# Altium PCB Thesis_PCB.PcbDoc
Units mil, origin at the board's own origin, x right, y up, seen from the top; angles counter-clockwise.
Board outline 1771.38 x 2177.28 mil, 2 copper layers (Top Layer, Bottom Layer); 6 components, 10 nets, 51 pads, 0 vias.
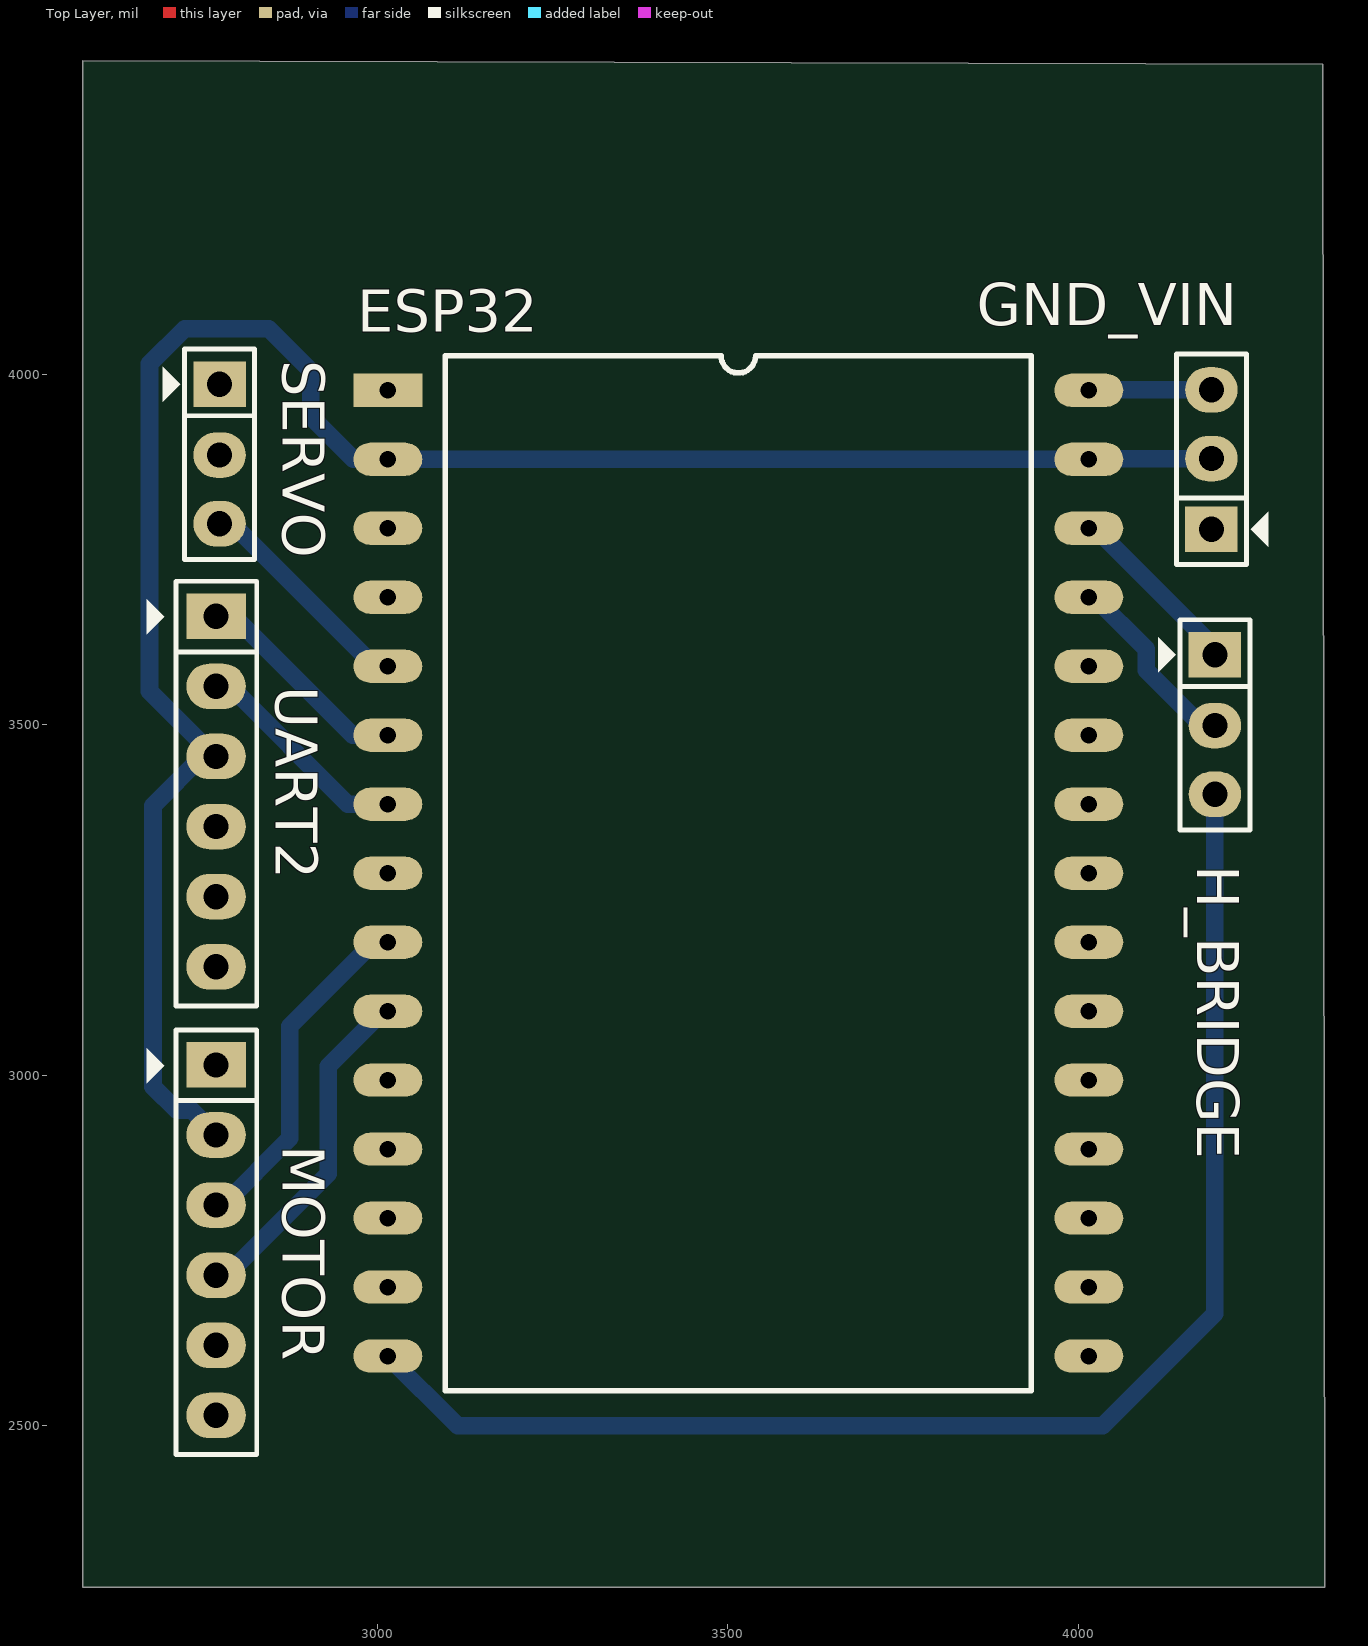
[diagram p0: Top Layer view]
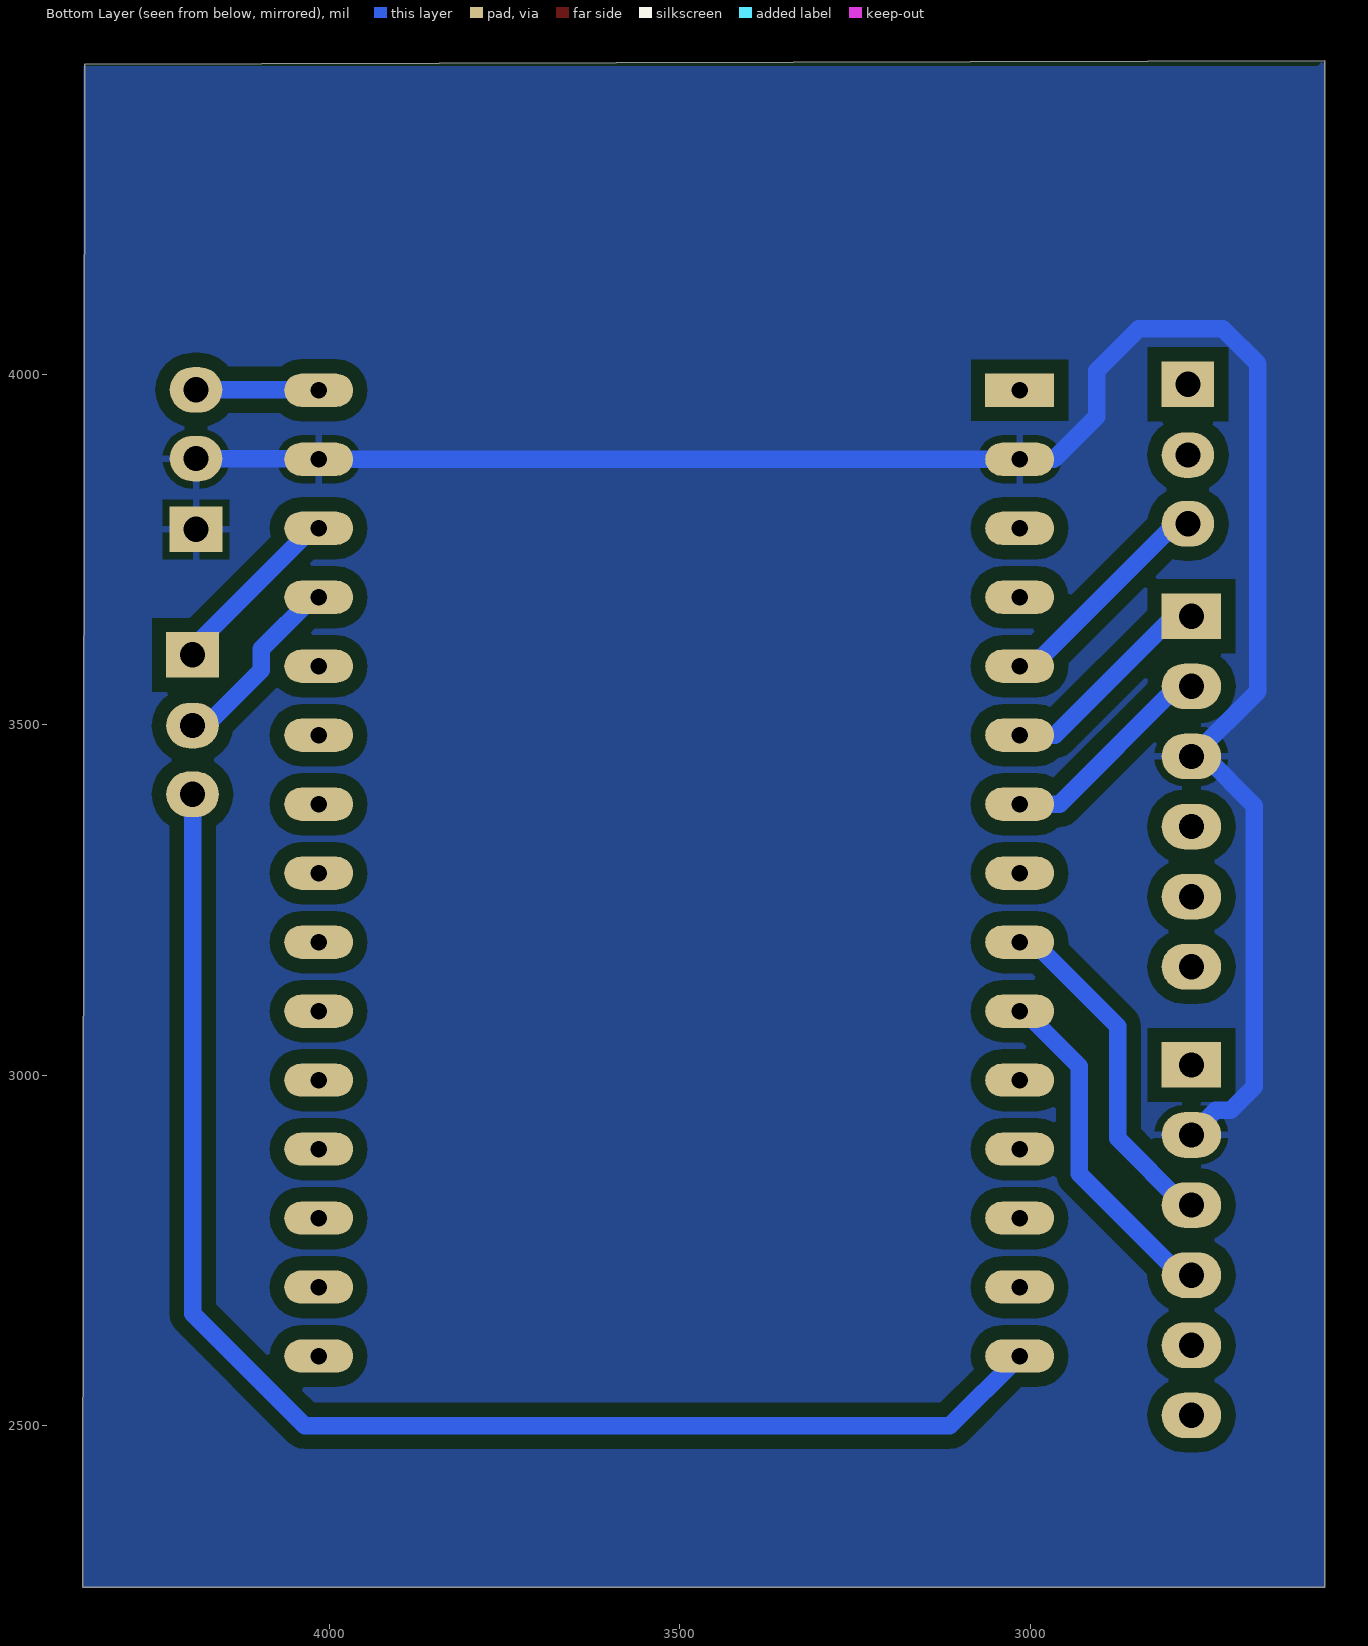
[diagram p1: Bottom Layer view, seen from below]
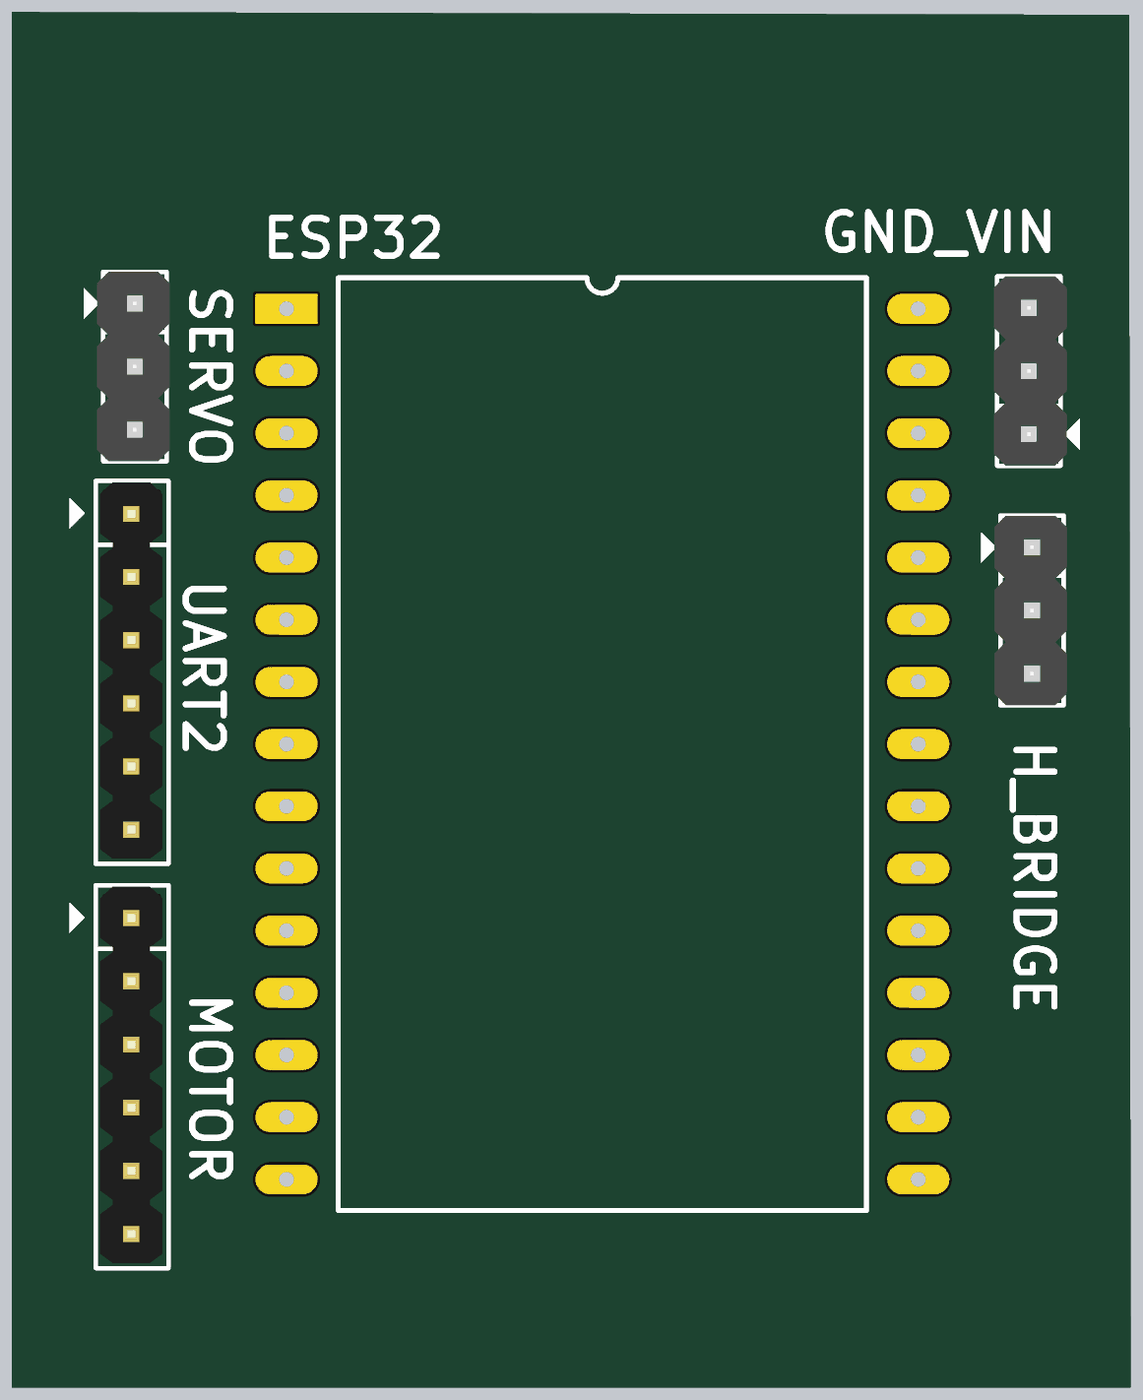
[diagram p2: 3D render of the assembled board from above, using the file's embedded part models]

## Layer stack, top to bottom
Top Solder: solder mask 0.4, Solder Resist, Dk 3.5
Top Layer: signal copper 1.4
Dielectric 1: dielectric 12.6, FR-4, Dk 4.8
Bottom Layer: signal copper 1.4
Bottom Solder: solder mask 0.4, Solder Resist, Dk 3.5

## Board outline
2580,2270 4351.38,2270 4348.65,4442.85 2580,4447.28

## Design rules (kind name [scope] priority, off if disabled: settings)
Clearance [All] p1: gap=20 ignorepadtopadclearanceinfootprint=FALSE except(0: Arc-Hole Track-Hole SMDPad-Hole THPad-Hole Via-Hole Fill-Hole Poly-Hole Region-Hole Text-Hole; 10: Fill-Fill Fill-Poly Fill-Region Poly-Poly Poly-Region Region-Region)
PolygonConnect [All] p1: connectstyle=Relief reliefconductorwidth=10 reliefentries=4 polygonreliefangle="90 Angle" airgapwidth=10
RoutingVias [All] p1: holewidth=28 width=50 viastyle="Through Hole" minholewidth=28 minwidth=50 maxholewidth=28 maxwidth=50
SolderMaskExpansion [All] p1: expansion=4
Width [All] p1: maxlimit=25 minlimit=25 preferedwidth=25
30 further rules are at their usual default settings.

## Components (designator, comment, footprint, x,y, rotation, side; value= is the part's Value field where it differs from the comment)
ESP32 "Component_1" ESP32 3015,3977.4 r0 top
GND_VIN "Header 3" JP3 4190,3879 r90 top
H_BRIDGE "Header 3" JP3 4195,3500 r270 top
MOTOR "Header 6" JP6 2770,3015 r270 top
SERVO "Header 3" JP3 2775,3886 r270 top
UART2 "Header 6" JP6 2770,3655 r270 top

## Footprints (in the part's own frame and the unit in brackets; to place one, negate y for a bottom-side part, rotate by r counter-clockwise, add the part's x,y. Pads: shape width x height; smd on the part's side, far side on the other; paste and mask are expansions set on the pad)
ESP32 [mm]
  rect 2.5x1.2 hole 0.6: 1(0,0)
  oval 2.5x1.2 hole 0.6: 2(0,-2.5) 3(0,-5) 4(0,-7.5) 5(0,-10) 6(0,-12.5) 7(0,-15) 8(0,-17.5) 9(0,-20) 10(0,-22.5) 11(0,-25) 12(0,-27.5) 13(0,-30) 14(0,-32.5) 15(0,-35) 16(25.4,-35) 17(25.4,-32.5) 18(25.4,-30) 19(25.4,-27.5) 20(25.4,-25) 21(25.4,-22.5) 22(25.4,-20) 23(25.4,-17.5) 24(25.4,-15) 25(25.4,-12.5) 26(25.4,-10) 27(25.4,-7.5) 28(25.4,-5) 29(25.4,-2.5) 30(25.4,0)
  silkscreen extent 2.08,-36.25 23.32,1.25
JP3 [mil] "Jumper 3"
  rect 65x75 hole 36: 1(-100,0)
  oval 65x75 hole 36: 2(1,0) 3(99,0)
  silkscreen extent -150,-81 150,50, body extent -150,-60 150,55, height 355
JP6 [mil] "JP6"
  rect 65x85 hole 36: 1(0,0)
  oval 65x85 hole 36: 2(100,0) 3(200,0) 4(300,0) 5(400,0) 6(500,0)
  silkscreen extent -50,-99 556,58, body extent -48,-50 548,48, height 323

## Part data
GND_VIN H_BRIDGE SERVO: "Header, 3-Pin", LatestRevisionDate=17-Jul-2002, LatestRevisionNote="Re-released for DXP Platform.", Publisher="Altium Limited"
MOTOR UART2: "Header, 6-Pin", LatestRevisionDate=17-Jul-2002, LatestRevisionNote="Re-released for DXP Platform.", Publisher="Altium Limited"

## Nets (pads, with @x,y where several pads share a name; then routed paths per layer and width w, separated by ;. In a path a pad name is that pad's centre, name@x,y a point inside that pad or via, vN(x,y) a via of type N, cw(c..) or ccw(c..) an arc to the next point about the centre after c; other vN are vias at no path point)
GND: ESP32.2 ESP32.29 GND_VIN.1 GND_VIN.2 MOTOR.2 UART2.3 | length 2888.4
  Bottom Layer w25: MOTOR.2 2735,2950 2714.04,2950 2680,2984.04 2680,3385 2750,3455 UART2.3@2768.08,3455 ; UART2.3 UART2.3@2768.08,3455 ; GND_VIN.2 4016.02,3880 ESP32.29 ESP32.2 2966.02,3878.98 2905,3940 2905,4005 2845,4065 2725,4065 2675,4015 2675,3548.08 UART2.3@2768.08,3455
NetESP32_5: ESP32.5 SERVO.3 | length 324.2
  Bottom Layer w25: SERVO.3 2793,3787 2996.3,3583.7 ESP32.5
NetESP32_6: ESP32.6 UART2.1 | length 315.3
  Bottom Layer w25: UART2.1 2795,3655 2964.72,3485.28 ESP32.6
NetESP32_7: ESP32.7 UART2.2 | length 314.6
  Bottom Layer w25: UART2.2 2790,3555 2958.15,3386.85 ESP32.7
NetESP32_9: ESP32.9 MOTOR.3 | length 494.1
  Bottom Layer w25: MOTOR.3 2780,2815 2875,2910 2875,3070 2995,3190 ESP32.9
NetESP32_10: ESP32.10 MOTOR.4 | length 497.7
  Bottom Layer w25: MOTOR.4@2775,2720 MOTOR.4 2785,2715 2930,2860 2930,3013.11 3008.47,3091.57 ESP32.10
NetESP32_15: ESP32.15 H_BRIDGE.3 | length 2028.5
  Bottom Layer w25: ESP32.15 3114.45,2500 4035,2500 4195,2660 H_BRIDGE.3
NetESP32_27: ESP32.27 H_BRIDGE.2 | length 273.4
  Bottom Layer w25: ESP32.27 4022.87,3682.13 4096.71,3608.29 4096.71,3578.29 4175,3500 4194,3500 H_BRIDGE.2
NetESP32_28: ESP32.28 H_BRIDGE.1 | length 260.6
  Bottom Layer w25: ESP32.28 4024.45,3780.55 4195,3610 H_BRIDGE.1
VIN: ESP32.30 GND_VIN.3 | length 175.2
  Bottom Layer w25: ESP32.30 4015.6,3978 GND_VIN.3
pads on no net: ESP32.1 ESP32.3 ESP32.4 ESP32.8 ESP32.11 ESP32.12 ESP32.13 ESP32.14 ESP32.16 ESP32.17 ESP32.18 ESP32.19 ESP32.20 ESP32.21 ESP32.22 ESP32.23 ESP32.24 ESP32.25 ESP32.26 MOTOR.1 MOTOR.5 MOTOR.6 SERVO.1 SERVO.2 UART2.4 UART2.5 UART2.6

## Polygon pours and split planes (outlines as drawn)
GND on Bottom Layer "GND" (solid, pour order 4): 2580,4450 2580,2270 4350,2270 4350,4440 2590,4440